# EAGLE board teemsyUp (EAGLE 9.1.3)
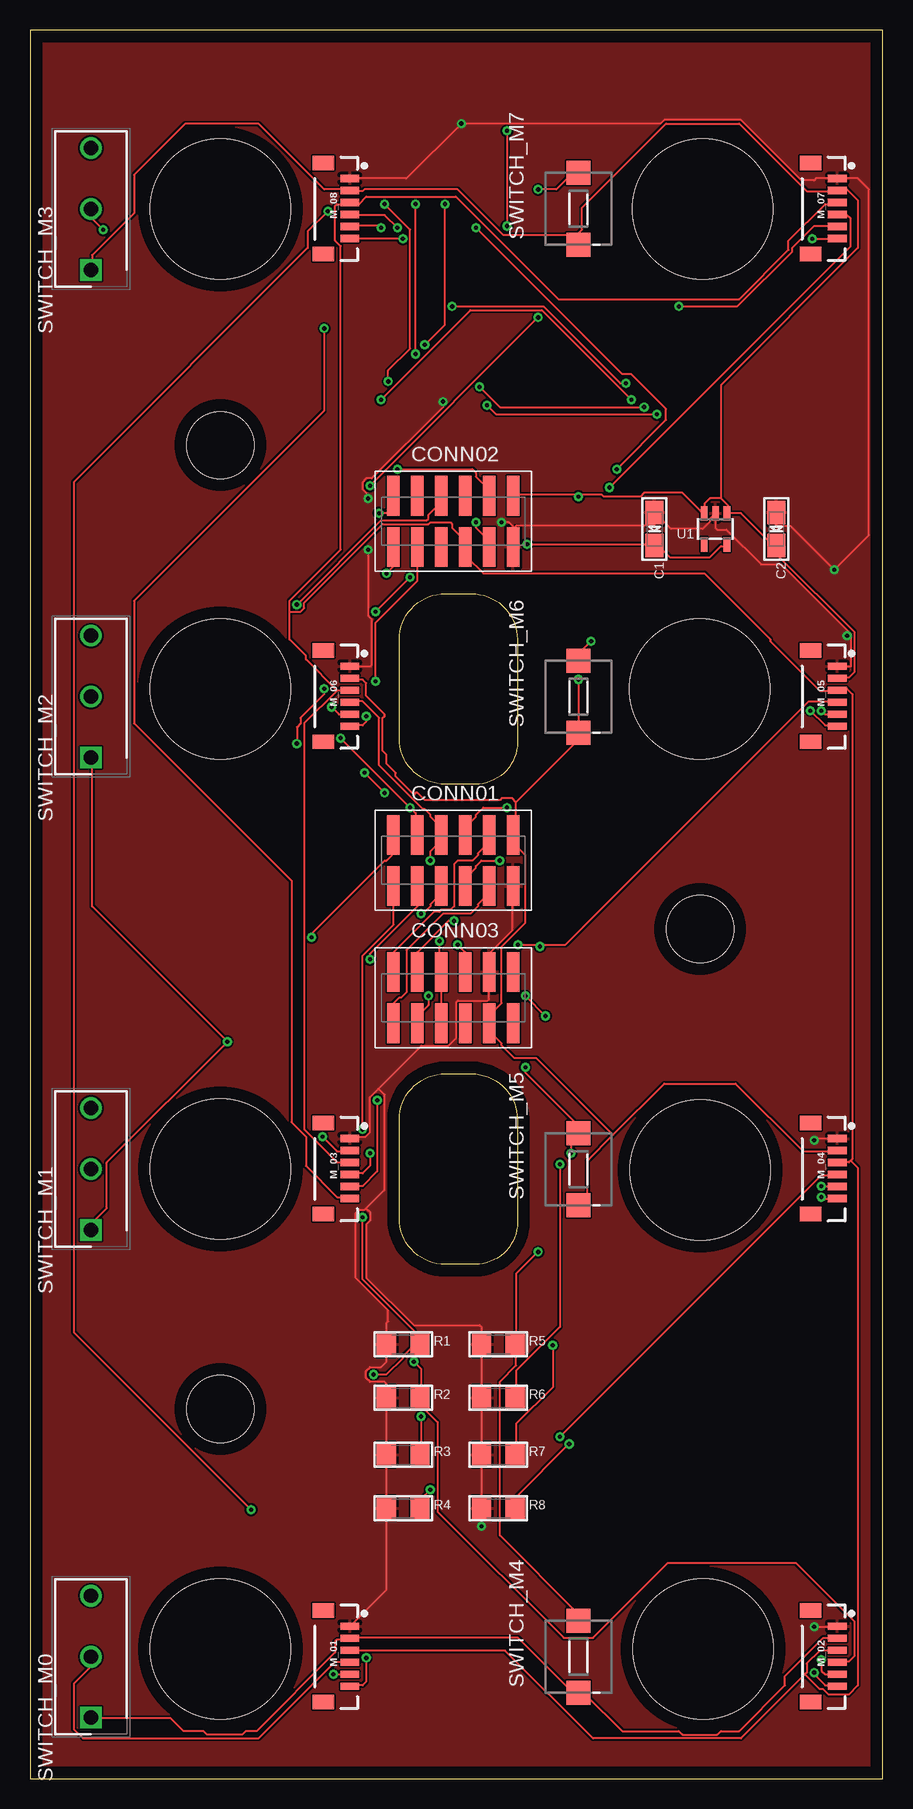
[diagram p0: board, top side]
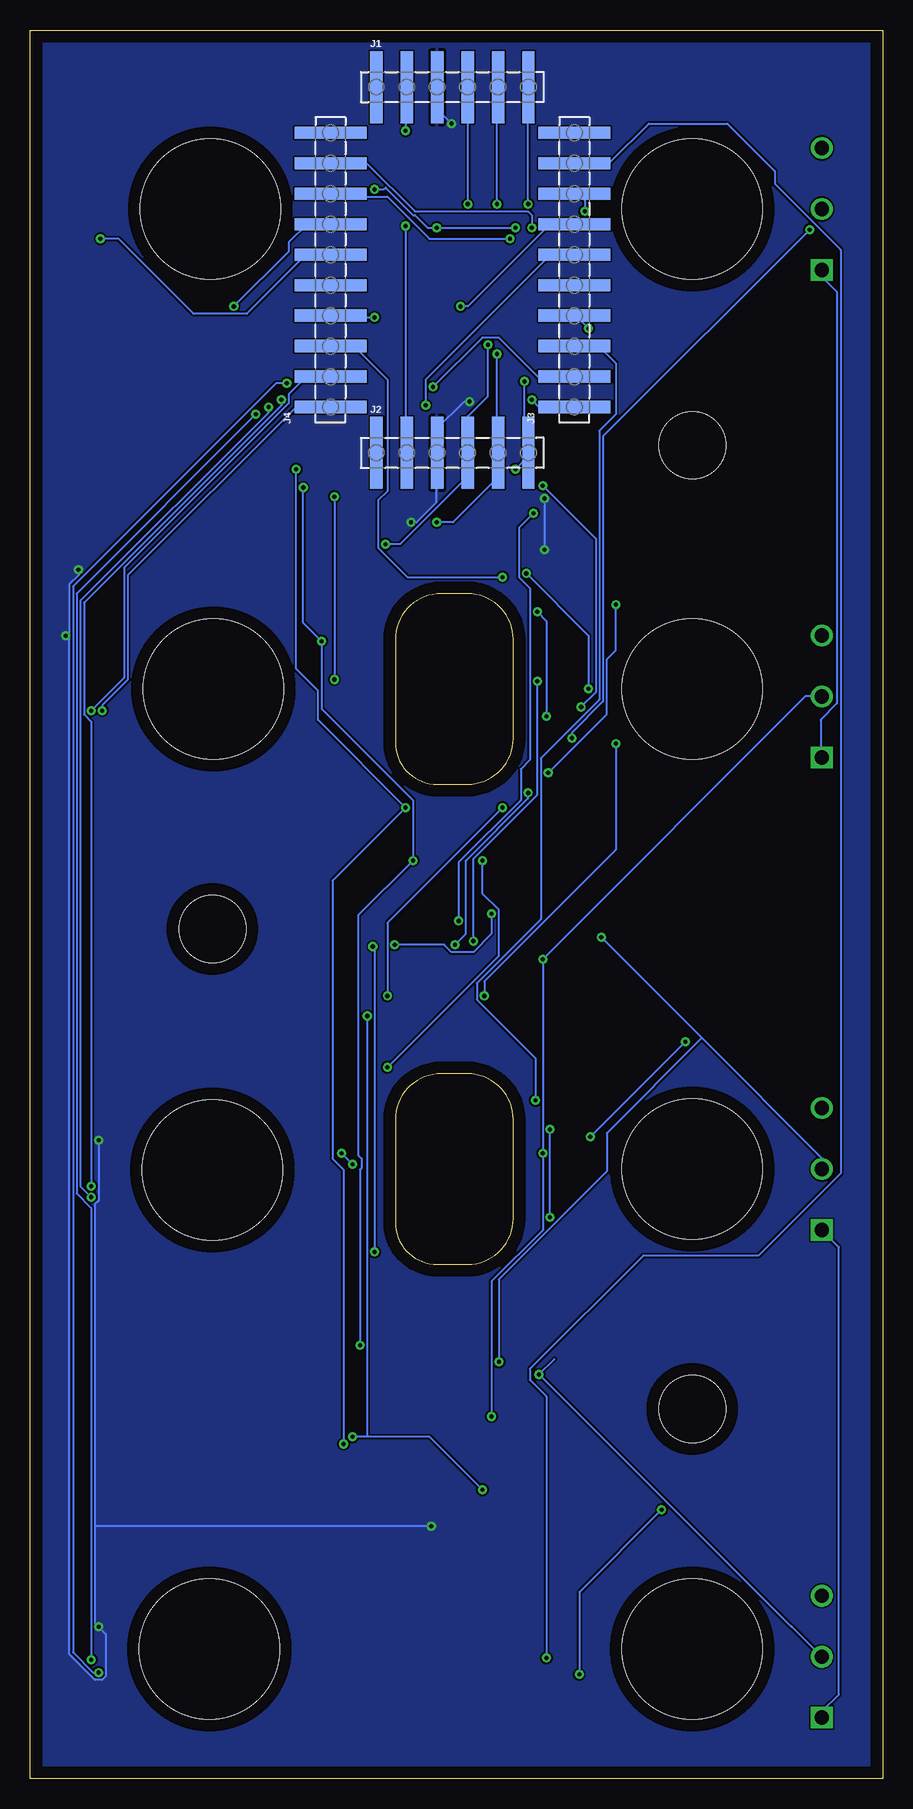
[diagram p1: board, bottom side, seen from below]

Size 71.1 x 145.72 mm. Coordinates in mm from the lower left corner, seen from the top.
Outline: 0,0 71.1,0 71.1,145.72 0,145.72 0,0
Outline: 40.64,46.35 arc-90 37.15,42.86 34.61,42.86 arc-90 30.8,46.67 30.8,54.29 30.8,54.93 arc-90 34.61,58.74 36.83,58.74 arc-90 40.64,54.93 40.64,46.99 40.64,46.35
Outline: 40.64,86.36 arc-90 37.15,82.87 34.61,82.87 arc-90 30.8,86.68 30.8,94.3 30.8,94.93 arc-90 34.61,98.74 36.83,98.74 arc-90 40.64,94.93 40.64,87 40.64,86.36
Copper layers (1*16): Top 0.035mm / dielectric 1.5mm / Bottom 0.035mm
Design rules "default": minimum track width 6mil, minimum drill 0.35mm, track to track 6mil, track to pad 6mil, pad to pad 6mil, via to via 6mil, smd to smd 6mil, copper to edge 40mil, drill to drill 6mil, minimum pad ring 10mil, minimum via ring 8mil, stop-mask expansion 4mil, vias tented up to drill 0mil, thermal gap 10mil
Holes 5.59 mm at 55.88,70.8 15.88,111.12 15.88,30.8
Holes 11.68 mm at 15.88,10.79 55.88,50.74 15.88,50.8 56.13,10.79 15.88,90.81 55.82,90.81 56.07,130.81 15.88,130.81

## Footprints (pad centres in the part's own frame; a part is rotated, then mirrored left to right if it is on the bottom)
EIA3216-18/A-R = smd 1.95 x 1.5: + 1.375,0; - -1.375,0
TMMH-105-12 = smd 1.016 x 3.302: 1 -5.27,-2.134; 2 -5.27,2.134; 3 -3.27,-2.134; 4 -3.27,2.134; 5 -1.27,-2.134; 6 -1.27,2.134; 7 0.73,-2.134; 8 0.73,2.134; 9 2.73,-2.134; 10 2.73,2.134; 11 4.73,2.134; 12 4.73,-2.134
1X06_SMD_MALE = smd 1.02 x 6: 1 0,0; 2 2.54,0; 3 5.08,0; 4 7.62,0; 5 10.16,0; 6 12.7,0
1X10_SMD_MALE = smd 1.02 x 6: 1 0,0; 2 2.54,0; 3 5.08,0; 4 7.62,0; 5 10.16,0; 6 12.7,0; 7 15.24,0; 8 17.78,0; 9 20.32,0; 10 22.86,0
1X06-1MM = smd 0.6 x 1.55: 1 -2.54,1.27; 2 -1.54,1.27; 3 -0.54,1.27; 4 0.46,1.27; 5 1.46,1.27; 6 2.46,1.27 | smd 1.2 x 1.8: P$1 -3.84,-0.955; P$2 3.76,-0.955
1206 = smd 1.6 x 1.8: 1 -1.4,0; 2 1.4,0
SHDR3W100P0X508_1X3_1280X580X5 = drill 1.2 pad 1.8 square: 1 0,0 | drill 1.2 pad 1.8: 2 5.08,0; 3 10.16,0
DTSM-3 = smd 2 x 2: 1 -3,0; 2 3,0
SOT23-5 = smd 0.55 x 1.2: 1 -0.95,-1.3; 2 0,-1.3; 3 0.95,-1.3; 4 0.95,1.3; 5 -0.95,1.3

## Placement (x,y rotation side)
C1  [EIA3216-18/A-R]  52.07,104.14 270 top
C2  [EIA3216-18/A-R]  62.23,104.14 270 top
CONN01  TMMH-105-12  [TMMH-105-12]  35.56,76.52 0 top
CONN02  TMMH-105-12  [TMMH-105-12]  35.56,104.78 0 top
CONN03  TMMH-105-12  [TMMH-105-12]  35.56,65.09 0 top
J1  [1X06_SMD_MALE]  42.23,140.97 0 bottom
J2  [1X06_SMD_MALE]  42.23,110.49 0 bottom
J3  [1X10_SMD_MALE]  25.72,114.3 90 bottom
J4  [1X10_SMD_MALE]  46.04,114.3 90 bottom
M_01  [1X06-1MM]  25.4,10.16 270 top
M_02  [1X06-1MM]  66.04,10.16 270 top
M_03  [1X06-1MM]  25.4,50.8 270 top
M_04  [1X06-1MM]  66.04,50.8 270 top
M_05  [1X06-1MM]  66.04,90.17 270 top
M_06  [1X06-1MM]  25.4,90.17 270 top
M_07  [1X06-1MM]  66.04,130.81 270 top
M_08  [1X06-1MM]  25.4,130.81 270 top
R1  [1206]  31.11,36.2 0 top
R2  [1206]  31.11,31.75 0 top
R3  [1206]  31.11,26.99 0 top
R4  [1206]  31.11,22.54 0 top
R5  [1206]  39.05,36.2 0 top
R6  [1206]  39.05,31.75 0 top
R7  [1206]  39.05,26.99 0 top
R8  [1206]  39.05,22.54 0 top
SWITCH_M0  D2F-5  [SHDR3W100P0X508_1X3_1280X580X5]  5.08,5.08 90 top
SWITCH_M1  D2F-5  [SHDR3W100P0X508_1X3_1280X580X5]  5.08,45.72 90 top
SWITCH_M2  D2F-5  [SHDR3W100P0X508_1X3_1280X580X5]  5.08,85.09 90 top
SWITCH_M3  D2F-5  [SHDR3W100P0X508_1X3_1280X580X5]  5.08,125.73 90 top
SWITCH_M4  DTSM-3  [DTSM-3]  45.72,10.16 90 top
SWITCH_M5  DTSM-3  [DTSM-3]  45.72,50.8 90 top
SWITCH_M6  DTSM-3  [DTSM-3]  45.72,90.17 90 top
SWITCH_M7  DTSM-3  [DTSM-3]  45.72,130.81 90 top
U1  [SOT23-5]  57.15,104.14 180 top

## Library data of the parts
C1 C2 R1-R8 U1 = microbuilder
CONN01-CONN03 = TMMH-105-XX-XX-DV
J1 J2 = SparkFun-Connectors; PROD_ID: CONN-11293
J3 J4 = SparkFun-Connectors; PROD_ID: CONN-11291
M_01-M_08 = SparkFun-Connectors; PROD_ID: CONN-08249; SF_ID: GPS-00579
SWITCH_M0 SWITCH_M1-SWITCH_M3 = D2F-5; ALLIED_NUMBER: 71203873; ALLIED_PRICE-STOCK: https://www.alliedelec.com/omron-electronic-components-d2f-5/71203873/; DESCRIPTION: OMRON ELECTRONIC COMPONENTS - D2F-5 - MICROSWITCH, PLUNGER, SPDT, 5A, 250V, TH; HEIGHT: 5.8mm; MANUFACTURER_NAME: Omron Electronics; MANUFACTURER_PART_NUMBER: D2F-5; MOUSER_PART_NUMBER: 653-D2F-5; MOUSER_PRICE-STOCK: https://www.mouser.com/Search/Refine.aspx?Keyword=653-D2F-5
SWITCH_M4-SWITCH_M7 = switch-tact

## Nets
3.3V: C1.+ J1.4 J2.4 U1.5
GND_MCU: C1.- C2.- CONN01.12 CONN02.12 CONN03.10 J1.3 J2.3 M_01.1 M_02.1 M_03.1 M_04.1 M_05.1 M_06.1 M_07.1 M_08.1 R1.1 R2.1 R3.1 R4.1 R5.1 R6.1 R7.1 R8.1 U1.2
I2CM_0: CONN01.1 M_01.4 R1.2 SWITCH_M0.2
I2CM_1: CONN01.2 M_02.4 R2.2 SWITCH_M1.2
I2CM_2: CONN01.3 M_03.4 R3.2 SWITCH_M2.2
I2CM_3: CONN01.4 M_04.4 R4.2 SWITCH_M3.2
I2CM_4: CONN01.5 M_05.4 R5.2 SWITCH_M4.2
I2CM_5: CONN01.6 M_06.4 R6.2 SWITCH_M5.2
I2CM_6: CONN01.7 M_07.4 R7.2 SWITCH_M6.2
I2CM_7: CONN01.8 M_08.4 R8.2 SWITCH_M7.2
I2CM_8: CONN01.9 CONN03.1
I2CM_9: CONN01.10 CONN03.2
I2CM_10: CONN02.1 CONN03.3
I2CM_11: CONN02.2 CONN03.4
I2CM_12: CONN02.3 CONN03.5 CONN03.6
I2CM_13: CONN02.4
I2CM_14: CONN03.7
I2CM_15: CONN02.6 CONN03.8
I2CS_0: J3.9 M_01.6
I2CS_1: J3.8 M_01.5
I2CS_2: J3.7 M_02.6
I2CS_3: J3.6 M_02.5
I2CS_4: J3.4 M_03.6
I2CS_5: J3.3 M_03.5
I2CS_6: J3.2 M_04.6
I2CS_7: J3.1 M_04.5
I2CS_8: J4.1 M_05.6
I2CS_9: J4.2 M_05.5
I2CS_10: J4.3 M_06.6
I2CS_11: J4.4 M_06.5
I2CS_12: J4.6 M_07.6
I2CS_13: J4.7 M_07.5
I2CS_14: J4.8 M_08.6
I2CS_15: J4.9 M_08.5
IC2M_14: CONN02.5
MUX_INT: J1.1
MUX_OSCIO: J2.1
MUX_RESET: J1.2 J2.2
N$12: CONN03.11
N$16: SWITCH_M3.3
N$17: SWITCH_M2.3
N$18: SWITCH_M1.3
N$19: SWITCH_M0.3
N$22: CONN03.12
NEO_PIXEL: CONN02.7 M_01.3 M_02.3 M_03.3 M_04.3 M_05.3 M_06.3 M_07.3 M_08.3
S_SCL: CONN02.10 J1.6 J2.6
S_SDA: CONN02.9 J1.5 J2.5
S_SEN_01: CONN02.8
VCC1: J3.5
VCC2: J4.5
VCC_MCU: C2.+ CONN01.11 CONN02.11 CONN03.9 M_01.2 M_02.2 M_03.2 M_04.2 M_05.2 M_06.2 M_07.2 M_08.2 SWITCH_M0.1 SWITCH_M1.1 SWITCH_M2.1 SWITCH_M3.1 SWITCH_M4.1 SWITCH_M5.1 SWITCH_M6.1 SWITCH_M7.1 U1.1 U1.3

## Tracks (layer width: path | path; a pad name or v marks a point on that pad's centre or on a via)
3.3V  (via drill 0.35)
  Top 0.152: U1.5 58.06,102.72 57.61,102.72 56.69,101.8 53.34,101.8 52.43,102.72 52.12,102.72 C1.+ 51.97,102.87 v41.45,102.87 | v34.59,131.22 34.59,121.16 v32.92,119.48
  Bottom 0.152: v41.45,102.87 40.23,102.87 34.75,108.36 34.75,110.49 J2.4 34.59,110.49 34.59,113.54 32.92,115.21 v32.92,119.48 | v34.59,131.22 34.59,140.97 J1.4
GND_MCU  (via drill 0.35)
  Top 0.152: M_01.1 29.71,15.74 R4.1 29.72,22.55 29.72,26.98 R3.1 29.72,27.13 29.72,31.7 R2.1 29.72,31.85 29.72,32.92 29.57,33.07 28.35,33.07 28.04,33.38 28.04,33.98 28.35,34.29 29.26,34.29 29.72,34.75 29.72,36.12 R1.1 29.72,36.27 29.72,37.95 29.87,38.1 29.87,39.01 27.13,41.76 27.13,47.09 27.43,47.4 27.89,47.4 28.04,47.55 | M_03.1 26.82,53.49 27.99,53.49 28.35,53.86 28.35,56.79 29.06,57.5 | 29.06,57.5 32.63,61.07 34.89,61.07 35.55,61.73 35.55,64.7 35.69,64.83 38.16,64.83 38.29,64.96 CONN03.10 38.25,67.36 38.25,68.73 40.23,70.71 40.23,74.37 CONN01.12 | v28.19,102.41 28.19,96.93 28.5,96.62 28.5,92.81 28.35,92.66 26.67,92.66 M_06.1 | v28.19,106.68 28.19,106.98 27.74,107.44 27.74,108.05 28.04,108.36 28.5,108.36 34.44,114.3 v34.44,114.76 | 68.43,95.25 68.43,95.4 62.64,101.19 60.96,101.19 58.06,104.09 57.3,104.09 57.15,104.24 U1.2 56.7,104.99 56.7,104.75 56.1,104.14 53.45,104.14 C1.- 52.12,105.46 52.12,104.55 51.97,104.39 40.54,104.39 40.39,104.24 | 68.43,95.25 68.43,92.66 67.36,92.66 M_05.1 | 40.39,104.24 40.23,104.09 40.23,102.72 CONN02.12 40.39,104.24 | v39.32,104.7 39.93,104.7 40.39,104.24 | M_08.1 31.39,133.35 v35.97,137.92 52.58,137.92 52.88,138.23 59.28,138.23 64.31,133.2 65.38,133.2 65.53,133.35 M_07.1 69.04,133.35 69.95,132.44 69.95,103.63 v67.06,100.74 63.4,104.39 62.33,104.39 62.18,104.55 62.18,105.46 C2.- | v68.12,95.25 68.43,95.25 | v65.38,12.65 67.21,12.65 M_02.1 | v65.38,53.19 65.53,53.34 M_04.1 | 29.06,57.5 29.57,57 29.57,49.07 28.04,47.55 | 28.04,47.55 28.35,47.24 28.35,46.48 28.04,46.18 28.04,41.76 32,37.8 37.49,37.8 37.64,37.64 37.64,36.27 R5.1 37.64,36.12 37.64,31.85 R6.1 37.64,31.7 37.64,27.13 R7.1 37.64,26.98 37.64,22.55 R8.1 37.64,22.4 v37.64,21.03
  Bottom 0.152: v28.19,106.68 v28.19,102.41 | v34.44,114.76 34.9,114.76 37.19,112.47 37.19,110.49 | 37.19,110.49 37.19,106.38 38.86,104.7 v39.32,104.7 | 37.19,110.49 J2.3 | v35.97,137.92 37.19,139.14 37.19,140.97 J1.3 | v67.06,100.74 67.06,100.28 67.82,99.52 67.82,95.56 v68.12,95.25 67.82,94.94 67.82,10.36 65.68,8.23 65.08,8.23 64.77,8.53 64.77,12.04 v65.38,12.65 65.68,12.95 65.68,21.03 | 65.68,21.03 65.68,47.85 65.38,48.16 v65.38,53.19 | v37.64,21.03 65.68,21.03
  pour Top: 0,146.05 72.39,146.05 72.39,0 -2.54,0 -2.54,146.05
  pour Bottom: 0,146.05 71.12,146.05 71.12,0 0,0
I2CM_0  (via drill 0.35)
  Top 0.152: M_01.4 26.67,9.75 25.45,9.75 19.05,3.35 4.42,3.35 3.66,4.12 3.66,7.92 5.03,9.3 5.03,10.06 SWITCH_M0.2 | 32,36.12 32.46,36.12 R1.2 32,36.12 | 32,36.12 31.09,35.2 31.09,35.05 29.72,33.68 v28.65,33.68 | v27.74,54.1 27.74,68.58 30.33,71.17 30.33,74.37 CONN01.1 | v27.74,46.79 27.74,41.6 32,37.34 32,36.12
  Bottom 0.152: v27.74,46.79 v27.74,54.1 | 27.38,34.95 v28.65,33.68 7.62,12.65 7.59,12.68 | SWITCH_M0.2 7.59,12.68 | 7.59,12.68 7.62,12.7
I2CM_1  (via drill 0.35)
  Top 0.152: M_02.4 67.36,9.75 68.28,9.75 68.73,10.21 68.73,13.11 63.86,17.98 53.19,17.98 46.94,11.73 44.5,11.73 33.98,22.25 33.98,29.72 32.61,31.09 32.61,31.7 R2.2 32.61,31.85 32.61,34.14 v32,34.75 | v23.47,70.1 23.47,70.41 29.57,76.5 29.72,76.5 30.18,76.96 30.18,78.64 CONN01.2
  Bottom 0.152: 15.09,61.72 5.03,51.66 5.03,50.9 SWITCH_M1.2 | 15.09,61.72 v23.47,70.1 | v32,34.75 32,41.6 23.01,50.6 23.01,53.8 15.09,61.72
I2CM_2  (via drill 0.35)
  Top 0.152: v28.35,52.12 28.35,51.05 27.74,50.44 26.67,50.44 M_03.4 | v28.35,68.28 28.35,68.73 32.31,72.69 32.31,74.37 CONN01.3 | v32.61,30.18 32.61,27.13 R3.2
  Bottom 0.152: v32.61,30.18 32.61,41.45 28.35,45.72 v28.35,52.12 v28.35,68.28 6.4,90.22 5.18,90.22 SWITCH_M2.2
I2CM_3  (via drill 0.35)
  Top 0.152: v44.2,28.5 65.99,50.29 67.21,50.29 M_04.4 | v33.38,24.08 32.61,23.32 32.61,22.55 R4.2 | v25.91,86.72 v31.7,80.92 32.16,80.47 32.16,78.79 CONN01.4 | v6.1,129.08 5.18,130 5.18,130.76 SWITCH_M3.2 | v41.3,65.23 v42.98,63.55
  Bottom 0.152: 42.98,28.5 37.8,28.5 v33.38,24.08 | 42.98,28.5 v44.2,28.5 | v25.91,86.72 25.91,87.17 23.32,89.76 23.32,111.86 v6.1,129.08 | v42.98,63.55 42.98,28.5 | v41.3,65.23 41.3,71.32 v31.7,80.92
I2CM_4  (via drill 0.35)
  Top 0.152: SWITCH_M4.2 45.72,13.72 39.17,20.27 39.17,33.07 40.54,34.44 40.54,36.12 R5.2 40.54,36.27 40.54,42.06 v42.37,43.89 | v40.69,69.49 42.52,69.49 | 42.52,69.49 44.65,69.49 64.92,89.76 67.21,89.76 M_05.4 | v32.61,72.08 32.77,72.08 33.38,72.69 33.38,72.85 34.29,73.76 CONN01.5 | 42.52,69.49 v42.52,69.34
  Bottom 0.152: v40.69,69.49 36.58,69.49 35.97,68.89 34.14,68.89 32.61,70.41 v32.61,72.08 | v42.37,43.89 42.37,69.19 v42.52,69.34
I2CM_5  (via drill 0.35)
  Top 0.152: M_06.4 26.67,89.76 27.74,89.76 29.11,88.39 29.11,84.43 32.77,80.77 32.92,80.77 33.38,80.31 33.38,80.16 34.29,79.25 CONN01.6 34.29,78.18 33.38,77.27 v33.38,76.5 | v44.2,51.21 44.2,37.64 40.54,33.98 40.54,31.85 R6.2 | v45.11,52.12 45.11,53.19 SWITCH_M5.2 45.72,54.41 41.3,58.83 v41.3,59.28
  Bottom 0.152: v45.11,52.12 v44.2,51.21 | v33.38,76.5 33.38,73.76 32,72.39 32,68.58 v41.3,59.28
I2CM_6  (via drill 0.35)
  Top 0.152: v43.59,36.12 43.59,32.61 40.54,29.57 40.54,27.13 R7.2 | v39.17,76.5 37.64,76.5 37.19,76.05 37.19,75.89 36.42,75.13 36.42,74.52 CONN01.7 | v48.31,107.59 68.43,127.71 68.43,130 68.12,130.3 67.36,130.3 M_07.4 | v46.79,94.79 45.72,93.73 SWITCH_M6.2
  Bottom 0.152: v43.59,36.12 43.59,50.75 43.43,50.9 43.43,51.66 43.74,51.97 43.74,71.93 v39.17,76.5 39.17,81.53 46.79,89.15 v46.79,94.79 48.31,96.32 v48.31,107.59
I2CM_7  (via drill 0.35)
  Top 0.152: v30.63,129.24 29.57,130.3 26.67,130.3 M_08.4 | v42.37,132.44 43.89,132.44 45.26,133.81 SWITCH_M7.2 | v44.96,27.89 40.54,23.47 40.54,22.55 R8.2 | v39.78,80.92 37.8,80.92 37.19,80.31 37.19,80.16 36.42,79.4 36.42,78.79 CONN01.8 | v37.19,129.24 49.38,117.04 50.14,117.04 53.03,114.15 53.03,113.23 v48.92,109.12
  Bottom 0.152: v30.63,129.24 v37.19,129.24 37.95,129.24 39.01,130.3 39.17,130.3 41.45,132.59 41.6,132.44 v42.37,132.44 | v44.96,27.89 44.96,50.75 45.87,51.66 45.87,74.83 v39.78,80.92 47.09,88.24 47.09,90.68 48.92,92.51 v48.92,109.12
I2CM_8
  Top 0.152: CONN03.1 30.33,63.09 30.33,64.62 30.79,65.08 30.94,65.08 31.39,65.53 31.39,69.04 34.44,72.08 36.73,72.08 37.34,72.69 37.34,72.85 38.25,73.76 38.25,74.37 CONN01.9
I2CM_9
  Top 0.152: CONN03.2 30.33,67.36 30.33,68.89 33.68,72.24 34.14,72.24 34.29,72.39 35.05,72.39 35.36,72.69 35.36,76.2 35.66,76.5 36.88,76.5 37.34,76.96 37.34,77.11 38.25,78.03 38.25,78.64 CONN01.10
I2CM_10  (via drill 0.35)
  Top 0.152: v33.22,65.23 33.22,64.47 32.31,63.55 32.31,63.09 CONN03.3 | v22.25,86.26 22.25,87.63 22.55,87.94 22.55,88.39 24.54,90.37 v24.54,90.83 | v29.72,100.43 30.33,101.04 30.33,102.56 CONN02.1
  Bottom 0.152: v33.22,65.23 33.22,66.45 22.25,77.42 v22.25,86.26 | v24.54,90.83 24.54,95.25 v29.72,100.43
I2CM_11  (via drill 0.35)
  Top 0.152: v35.36,71.48 34.9,71.48 32.31,68.89 32.31,67.36 CONN03.4 | v29.11,105.46 29.72,105.46 30.18,105.92 30.18,106.83 CONN02.2
  Bottom 0.152: v35.36,71.48 35.36,76.35 30.18,81.53 30.18,84.12 29.41,84.89 29.41,99.21 30.33,100.13 30.33,104.24 v29.11,105.46
I2CM_12  (via drill 0.35)
  Top 0.152: CONN03.5 CONN03.6 34.29,67.36 34.14,67.51 v34.14,69.8 | v28.8,91.44 28.8,96.32 32.31,99.82 32.31,102.56 CONN02.3
  Bottom 0.152: v28.8,91.44 28.8,81.99 34.14,76.66 v34.14,69.8
I2CM_15  (via drill 0.35)
  Top 0.152: CONN02.6 34.29,106.38 33.22,105.31 33.22,105 33.07,104.85 29.26,104.85 v22.25,97.84 | v29.57,82.14 v27.89,83.82 | v35.66,69.49 36.27,68.89 36.27,67.36 CONN03.8
  Bottom 0.152: v22.25,97.84 22.25,94.03 23.01,93.27 23.01,88.7 v27.89,83.82 | v29.57,82.14 29.57,81.69 34.75,76.5 34.75,70.41 v35.66,69.49
I2CS_0  (via drill 0.35)
  Top 0.152: v28.04,10.06 28.04,8.08 27.74,7.77 26.67,7.77 M_01.6
  Bottom 0.152: v28.04,10.06 28.04,31.85 29.41,33.22 29.41,34.14 19.96,43.59 10.36,43.59 3.5,50.44 3.5,127.41 8.99,132.89 8.99,133.96 12.95,137.92 19.51,137.92 22.71,134.72 25.6,134.72 J3.9
I2CS_1  (via drill 0.35)
  Top 0.152: v25.3,8.69 26.67,8.69 M_01.5 | v18.44,22.4 3.66,37.19 3.66,108.05 23.16,127.56 23.16,128.93 v24.84,130.61
  Bottom 0.152: v25.3,8.69 25.3,15.54 v18.44,22.4 | v24.84,130.61 24.84,131.52 25.3,131.98 25.6,131.98 J3.8
I2CS_2  (via drill 0.35)
  Top 0.152: v65.38,8.84 65.38,8.69 66.29,7.77 67.21,7.77 M_02.6 | v49.68,116.28 49.23,116.28 42.82,122.68 v35.2,122.68
  Bottom 0.152: v65.38,8.84 65.84,8.84 67.51,10.52 67.51,99.36 50.6,116.28 v49.68,116.28 | v35.2,122.68 34.59,122.68 27.74,129.54 J3.7
I2CS_3  (via drill 0.35)
  Top 0.152: v65.99,9.91 65.99,8.99 66.29,8.69 67.21,8.69 M_02.5 | v52.27,113.69 38.86,113.69 v38.1,114.45
  Bottom 0.152: v65.99,9.91 65.99,47.55 67.21,48.77 67.21,98.75 v52.27,113.69 | v38.1,114.45 38.1,116.59 27.74,126.95 25.76,126.95 J3.6
I2CS_4  (via drill 0.35)
  Top 0.152: v24.54,120.85 24.54,114 8.69,98.15 8.69,87.94 21.79,74.83 21.79,54.71 23.01,53.49 23.01,51.05 25.6,48.46 26.67,48.46 M_03.6
  Bottom 0.152: v24.54,120.85 25.6,121.92 J3.4
I2CS_5  (via drill 0.35)
  Top 0.152: v28.96,56.54 28.96,50.6 27.74,49.38 26.67,49.38 M_03.5
  Bottom 0.152: v28.96,56.54 28.96,60.05 33.83,64.92 33.83,66.29 28.5,71.63 28.5,85.04 23.62,89.92 23.62,112.32 22.25,113.69 22.25,117.96 23.62,119.33 25.6,119.33 J3.3
I2CS_6  (via drill 0.35)
  Top 0.152: v65.99,48.46 66.14,48.31 67.21,48.31 M_04.6 | v51.21,114.3 39.17,114.3 v37.49,115.98
  Bottom 0.152: v65.99,48.46 66.9,49.38 66.9,98.15 51.21,113.84 v51.21,114.3 | v37.49,115.98 33.38,120.09 32,120.09 28.65,116.74 25.76,116.74 J3.2
I2CS_7  (via drill 0.35)
  Top 0.152: v65.99,49.38 67.21,49.38 M_04.5 | v50.14,114.91 42.67,122.38 36.73,122.38 v29.26,114.91
  Bottom 0.152: v65.99,49.38 65.99,88.09 66.6,88.7 66.6,97.99 50.14,114.45 v50.14,114.91 | v29.26,114.91 28.65,114.3 J3.1
I2CS_8  (via drill 0.35)
  Top 0.152: v65.08,89 66.29,87.78 67.21,87.78 M_05.6
  Bottom 0.152: v65.08,89 65.08,89.46 62.94,91.59 62.94,100.28 48.92,114.3 J4.1
I2CS_9  (via drill 0.35)
  Top 0.152: v65.99,89 66.29,88.7 67.21,88.7 M_05.5
  Bottom 0.152: v65.99,89 63.25,91.75 63.25,100.89 49.53,114.61 49.53,115.37 48.16,116.74 46.18,116.74 J4.2
I2CS_10  (via drill 0.35)
  Top 0.152: v28.04,88.54 28.04,88.09 27.74,87.78 26.67,87.78 M_06.6 | v31.7,100.13 v28.8,97.23
  Bottom 0.152: v28.04,88.54 28.04,96.47 v28.8,97.23 | v31.7,100.13 39.62,100.13 42.06,102.56 42.06,106.53 41.3,107.29 41.3,116.59 44.04,119.33 46.02,119.33 J4.3
I2CS_11  (via drill 0.35)
  Top 0.152: v25.15,89.31 25.76,88.7 26.67,88.7 M_06.5 | v42.37,121.77 v28.35,107.75
  Bottom 0.152: v25.15,89.31 23.93,90.53 23.93,103.33 v28.35,107.75 | v42.37,121.77 45.87,121.77 46.02,121.92 J4.4
I2CS_12  (via drill 0.35)
  Top 0.152: v65.23,128.32 67.21,128.32 M_07.6
  Bottom 0.152: v65.23,128.32 63.7,128.32 57.45,122.07 53.03,122.07 48.16,126.95 46.18,126.95 J4.6
I2CS_13  (via drill 0.35)
  Top 0.152: v54.1,122.68 58.98,122.68 63.55,127.25 63.55,127.56 65.38,129.39 67.21,129.39 M_07.5
  Bottom 0.152: v54.1,122.68 49.53,127.25 49.53,128.02 48.01,129.54 J4.7
I2CS_14  (via drill 0.35)
  Top 0.152: v31.09,128.32 26.67,128.32 M_08.6
  Bottom 0.152: v31.09,128.32 37.8,128.32 41.3,131.83 45.87,131.83 46.02,131.98 J4.8
I2CS_15  (via drill 0.35)
  Top 0.152: v29.26,129.24 29.11,129.39 26.67,129.39 M_08.5
  Bottom 0.152: v29.26,129.24 29.26,130.3 29.57,130.61 39.01,130.61 42.98,134.57 46.02,134.57 J4.9
MUX_RESET  (via drill 0.35)
  Top 0.152: v39.78,137.31 v39.78,129.39
  Bottom 0.152: v39.78,129.39 39.78,110.49 J2.2 | v39.78,137.31 39.78,140.97 J1.2
NEO_PIXEL
  Top 0.152: 64.62,8.69 64.77,8.84 64.77,9.6 65.84,10.67 67.21,10.67 M_02.3 | 64.62,8.69 59.28,3.35 46.94,3.35 39.62,10.67 26.67,10.67 M_01.3 | 68.43,51.51 68.58,51.66 68.58,90.37 68.12,90.83 67.36,90.83 M_05.3 67.21,90.68 65.84,90.68 61.72,94.79 61.72,94.94 56.24,100.43 37.8,100.43 36.42,101.8 36.42,102.56 CONN02.7 36.27,102.72 36.27,103.17 35.2,104.24 35.2,104.55 35.05,104.7 33.38,104.7 33.22,104.55 29.41,104.55 22.86,97.99 22.86,97.54 22.55,97.23 21.64,97.23 | 68.43,51.51 68.28,51.36 67.36,51.36 M_04.3 | 25.6,90.68 22.86,87.94 22.86,54.1 25.6,51.36 26.67,51.36 M_03.3 | 25.6,90.68 26.67,90.68 M_06.3 | 26.67,131.22 25.6,131.22 25.45,131.06 25.45,128.17 25.91,127.71 25.91,102.41 21.64,98.15 21.64,97.23 | 21.64,97.23 21.64,94.94 23.01,93.57 23.01,93.27 25.6,90.68 | 26.67,131.22 27.43,131.22 28.04,131.83 35.51,131.83 44.04,123.29 59.13,123.29 63.25,127.41 63.25,128.17 66.29,131.22 67.21,131.22 M_07.3 | 26.67,131.22 M_08.3 | 64.62,8.69 65.84,7.47 66.14,7.47 66.6,7.01 68.28,7.01 69.04,7.77 69.04,50.9 68.43,51.51
S_SCL  (via drill 0.35)
  Top 0.152: v30.63,109.12 36.88,109.12 37.19,108.81 37.19,108.51 38.25,107.44 38.25,106.98 CONN02.10 | v29.57,131.22 31.7,129.08 31.7,119.18 29.87,117.35 v29.87,116.43
  Bottom 0.152: v30.63,109.12 29.57,110.19 29.57,110.49 | v29.57,131.22 29.57,140.97 J1.6 | v29.87,116.43 29.87,110.8 29.57,110.49 | 29.57,110.49 J2.6
S_SDA  (via drill 0.35)
  Top 0.152: v37.19,104.7 37.19,104.24 38.25,103.17 38.25,102.72 CONN02.9 | v32.16,118.72 v32.16,131.22
  Bottom 0.152: v37.19,104.7 35.81,104.7 32.16,108.36 32.16,110.49 | v32.16,131.22 32.16,140.97 J1.5 | 32.16,110.49 v32.16,118.72 | 32.16,110.49 J2.5
VCC_MCU  (via drill 0.35)
  Top 0.152: v24.38,53.49 25.6,52.27 26.67,52.27 M_03.2 | SWITCH_M1.1 5.18,45.72 5.18,46.33 6.4,47.55 6.4,51.36 v16.46,61.42 5.18,72.69 5.18,85.04 SWITCH_M2.1 | M_02.2 67.21,11.73 66.14,11.73 62.94,8.53 62.94,7.77 59.13,3.96 57.61,3.96 57.3,3.66 54.41,3.66 54.1,3.96 49.38,3.96 46.33,7.01 45.72,7.01 SWITCH_M4.1 45.26,7.16 40.69,11.73 26.67,11.73 M_01.2 26.67,11.58 25.6,11.58 25.45,11.43 25.45,10.52 18.9,3.96 17.98,3.96 17.68,3.66 14.78,3.66 14.48,3.96 12.8,3.96 11.73,5.03 5.18,5.03 SWITCH_M0.1 | 40.54,81.38 40.23,81.69 39.32,81.69 39.17,81.53 32.92,81.53 32.31,82.14 32.16,82.14 32,81.99 30.48,83.52 30.48,83.82 29.72,84.58 29.72,85.34 29.41,85.65 29.41,88.39 29.57,88.54 29.57,88.7 28.04,90.22 28.04,91.29 27.74,91.59 26.67,91.59 M_06.2 | 40.54,81.38 40.54,78.94 40.39,78.79 CONN01.11 40.39,78.64 40.39,77.88 41.3,76.96 41.3,71.32 39.32,69.34 39.32,64.62 38.41,63.7 38.41,63.09 CONN03.9 38.41,62.94 38.41,62.18 39.32,61.27 39.32,61.11 40.39,60.05 42.22,60.05 48.62,53.65 | 40.54,81.38 45.72,86.56 SWITCH_M6.1 v45.72,91.59 | 48.62,53.65 46.48,51.51 46.48,48.62 45.72,47.85 SWITCH_M5.1 | 48.62,53.65 52.88,57.91 58.83,57.91 64.47,52.27 67.21,52.27 M_04.2 | 56.24,105.61 56.24,106.22 56.69,106.68 57.61,106.68 | 56.24,105.61 56.24,105.46 U1.3 56.24,105.61 | 57.61,106.68 58.22,106.07 58.22,105.46 | M_05.2 67.36,91.75 68.28,91.75 68.73,92.2 68.73,95.56 62.33,101.96 62.33,102.72 C2.+ 62.18,102.87 61.87,102.87 59.28,105.46 58.22,105.46 | 58.22,105.46 U1.1 | 45.72,106.98 47.7,106.98 47.85,106.83 50.9,106.83 51.21,107.14 54.41,107.14 55.93,105.61 56.24,105.61
  Top 0.152: 45.72,106.98 40.39,106.98 CONN02.11 | 45.26,128.32 45.72,127.86 SWITCH_M7.1 45.26,128.32 | 45.26,128.32 44.96,128.63 39.47,128.63 35.66,132.44 27.89,132.44 27.74,132.28 26.67,132.28 M_08.2 26.67,132.44 24.54,132.44 19.05,137.92 12.95,137.92 8.69,133.66 8.69,130.45 5.18,126.95 5.18,125.73 SWITCH_M3.1 | 45.26,128.32 46.02,129.08 46.02,130.91 53.03,137.92 59.13,137.92 64.77,132.28 67.21,132.28 M_07.2 67.36,132.44 68.12,132.44 69.04,131.52 69.04,127.56 57.61,116.13 57.61,106.68 | 45.72,106.98 v45.72,106.83
  Bottom 0.152: v16.46,61.42 v24.38,53.49 | SWITCH_M0.1 5.03,5.18 5.03,5.64 3.66,7.01 3.66,44.3 SWITCH_M1.1 | v45.72,106.83 v45.72,91.59 | SWITCH_M2.1 5.18,85.19 5.18,88.24 3.81,89.61 3.81,123.9 5.03,125.12 5.03,125.73 SWITCH_M3.1